# Altium PCB VR Interface.PcbDoc
Units mm, origin at the board's own origin, x right, y up, seen from the top; angles counter-clockwise.
Board outline 130 x 130 mm, 2 copper layers (Top Layer, Bottom Layer), stack 1.271 mm thick; 18 components, 9 nets, 58 pads, 0 vias.
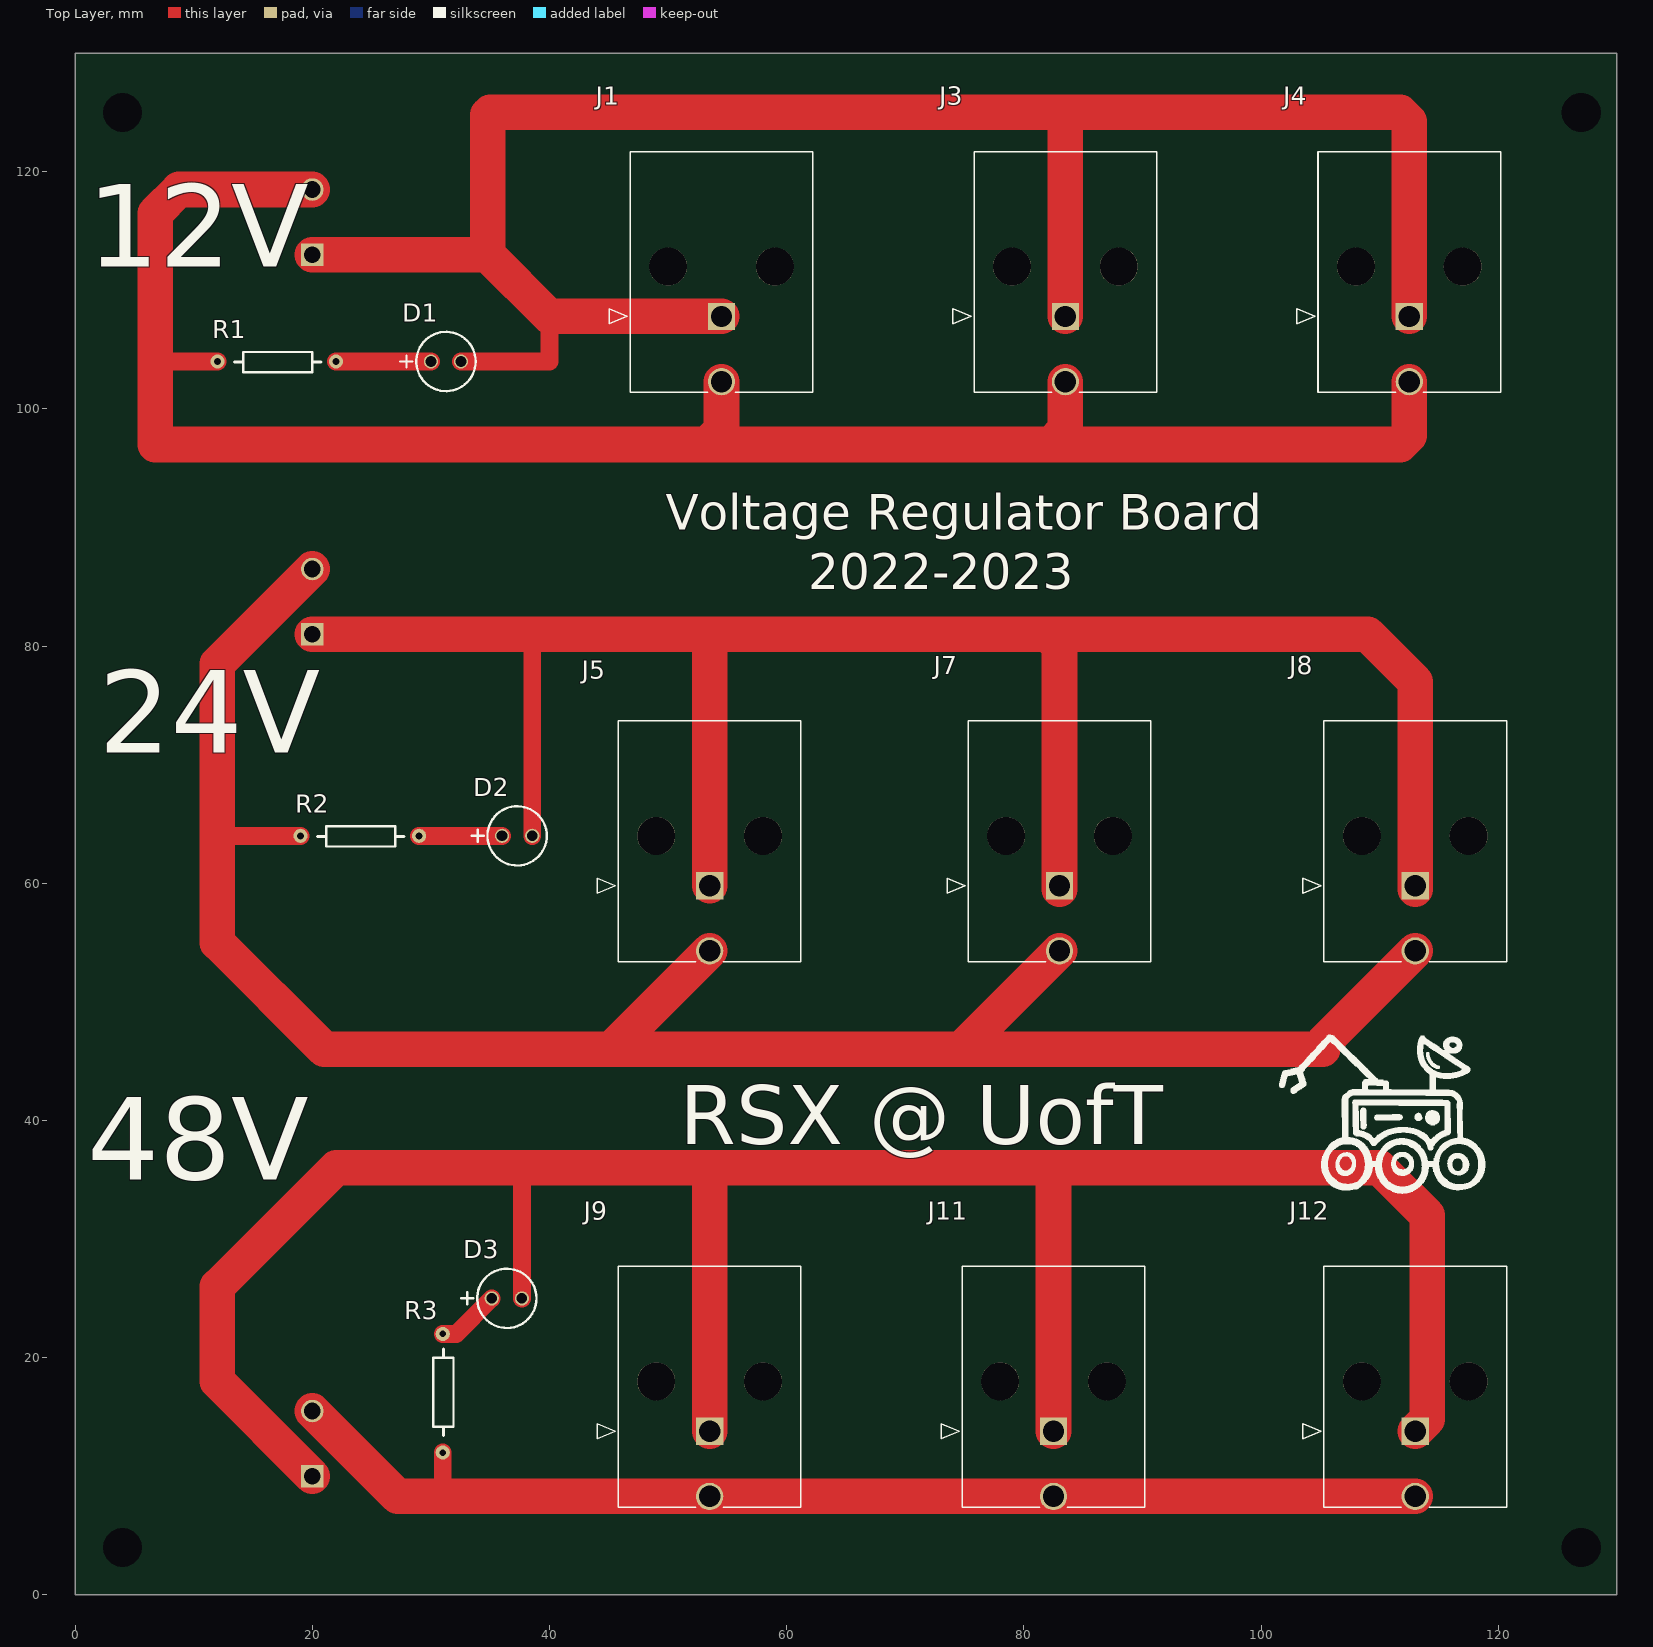
[diagram p0: Top Layer view]
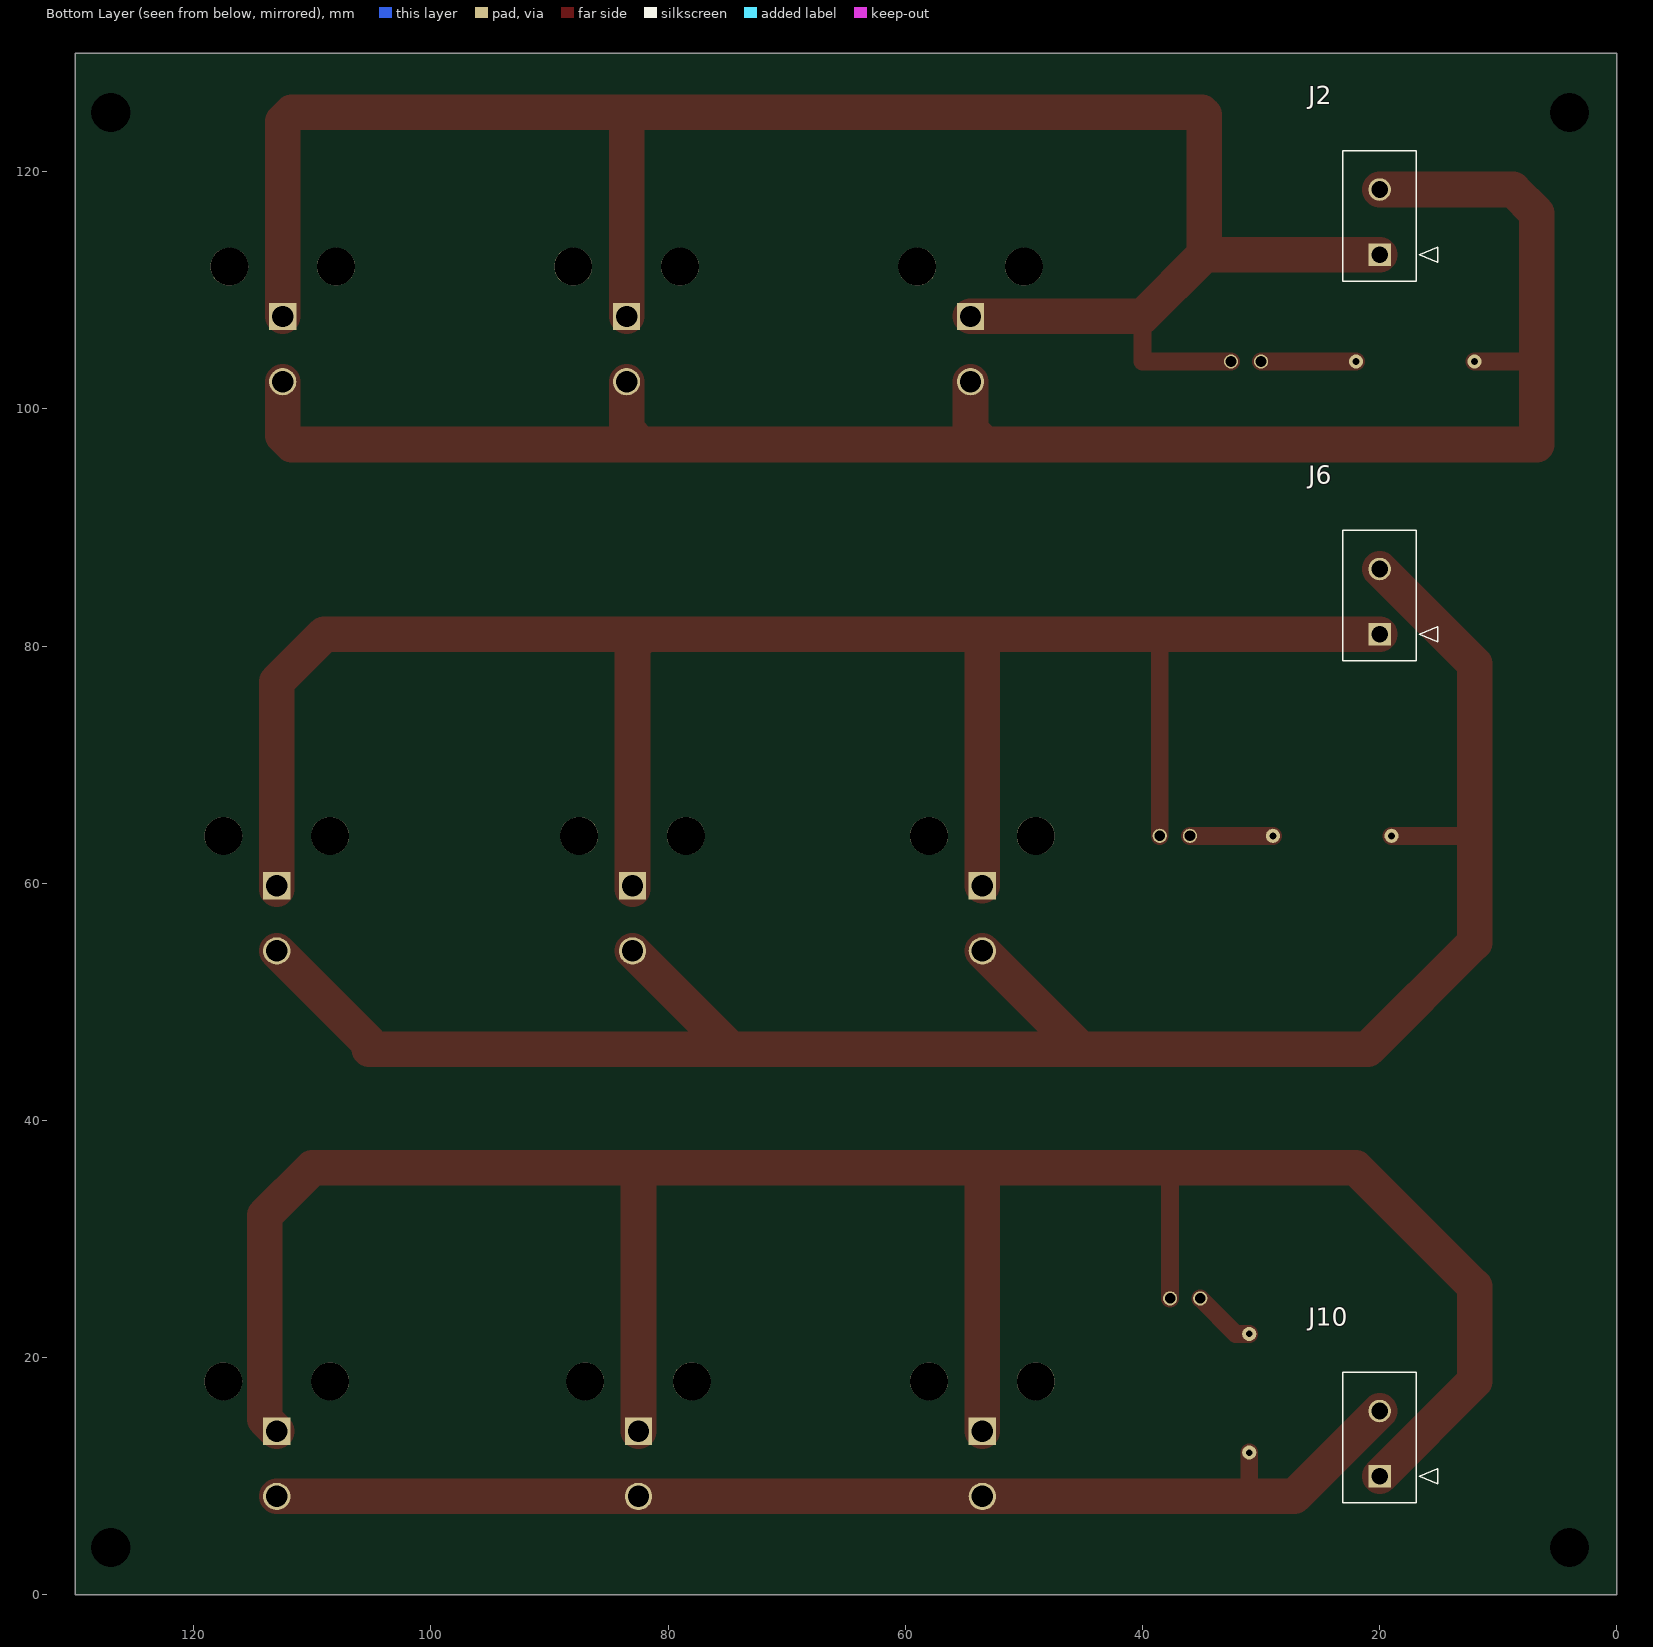
[diagram p1: Bottom Layer view, seen from below]
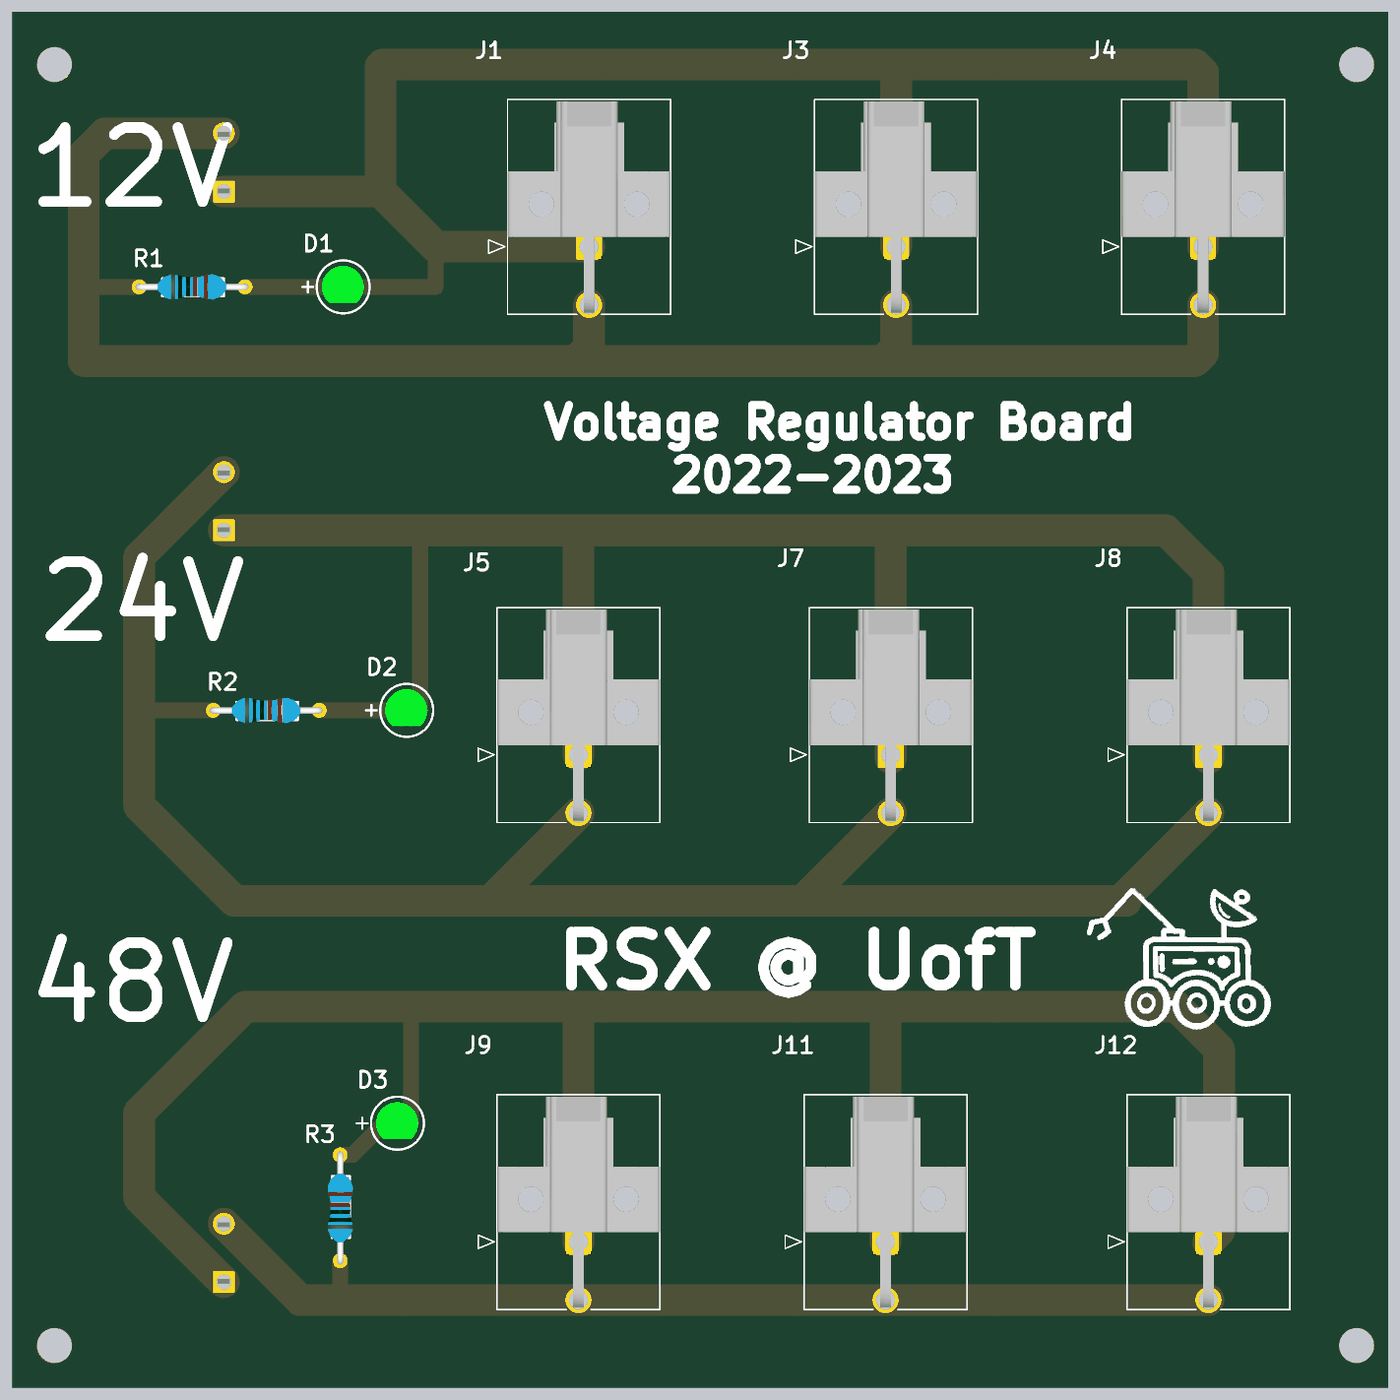
[diagram p2: 3D render of the assembled board from above, using the file's embedded part models]
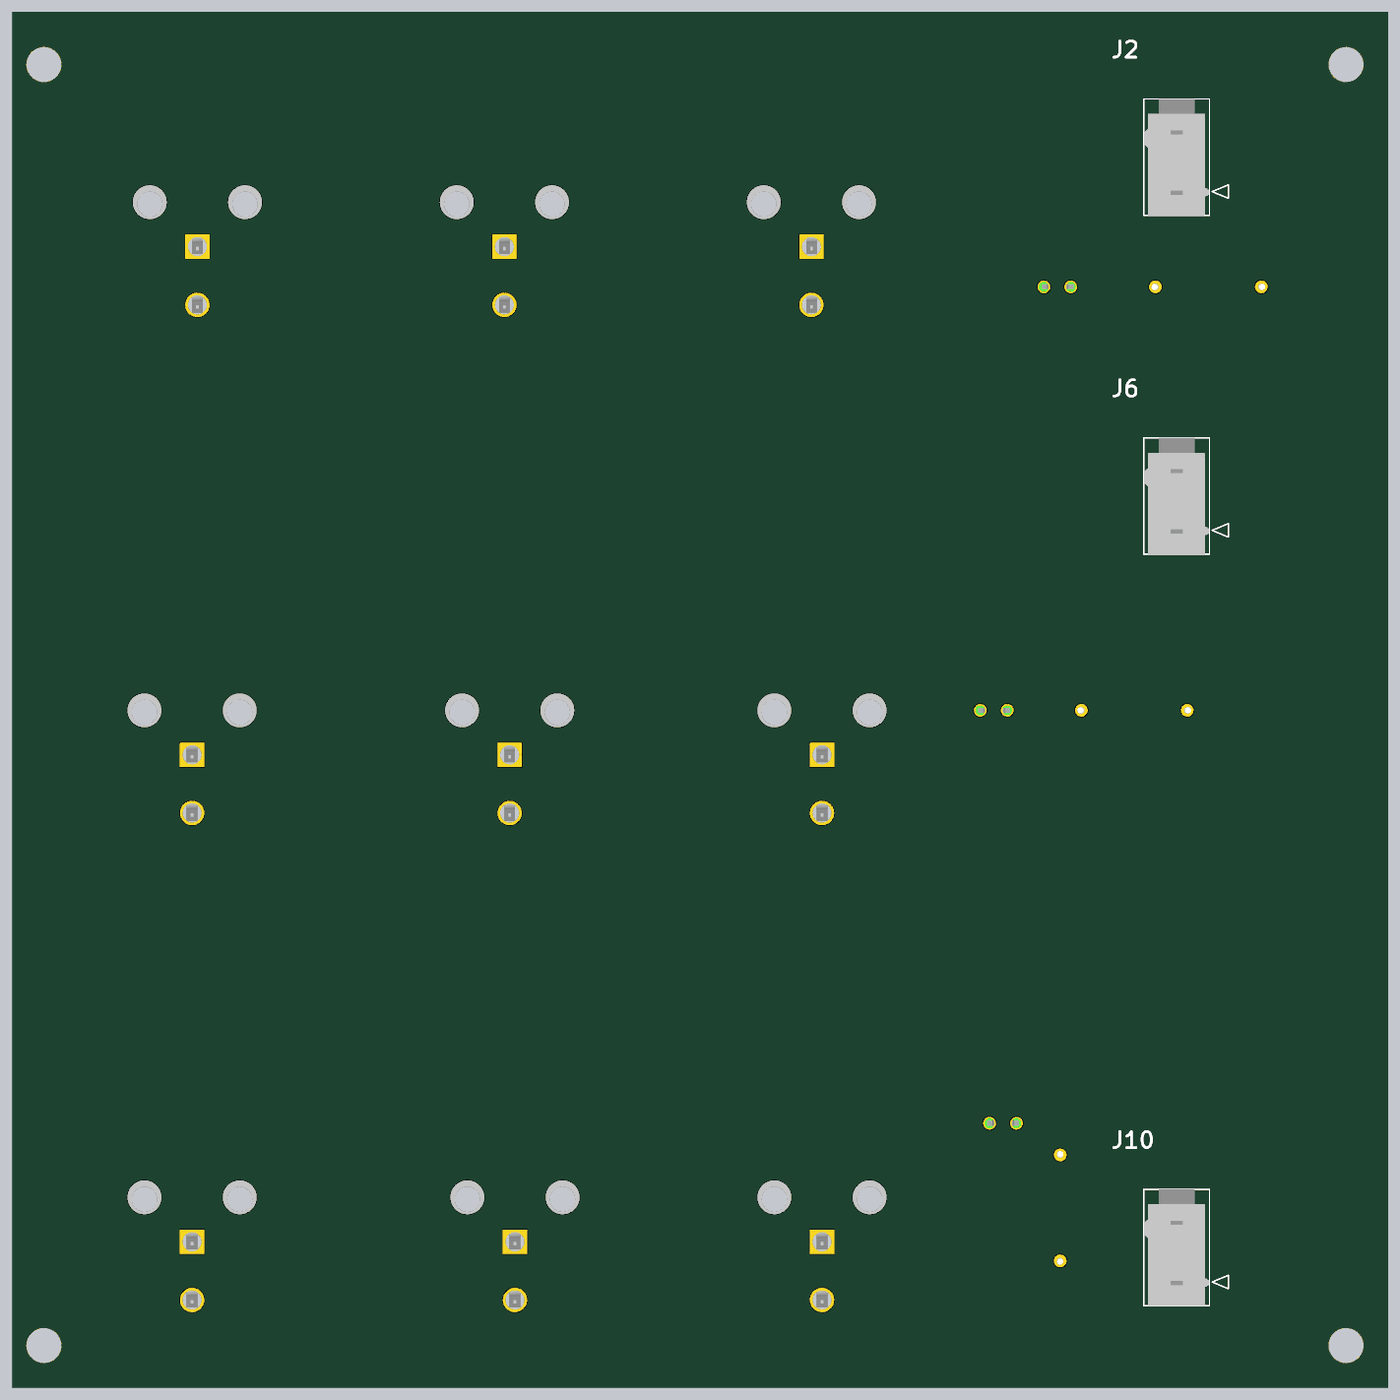
[diagram p3: 3D render of the assembled board from below, using the file's embedded part models]

## Layer stack, top to bottom
Top Solder: solder mask 0.0102, Solder Resist, Dk 3.5
Top Layer: signal copper 0.0356
Dielectric 1: dielectric 1.2, FR-4, Dk 4.8
Bottom Layer: signal copper 0.0356
Bottom Solder: solder mask 0.0102, Solder Resist, Dk 3.5

## Board outline
0,0 0,130 130,130 130,0

## Design rules (kind name [scope] priority, off if disabled: settings)
Clearance [All] p1: gap=0.254 ignorepadtopadclearanceinfootprint=FALSE
HoleSize [All] p1: absolutevalues=TRUE maxlimit=6.3 minlimit=0.2 maxpercent=80.000 minpercent=20.000
HoleToHoleClearance [All] p1: gap=0.5 allowstackedmicrovias=TRUE
PolygonConnect [All] p1: connectstyle=Relief reliefconductorwidth=0.254 reliefentries=4 polygonreliefangle="90 Angle" airgapwidth=0.254
RoutingVias [All] p1: holewidth=0.711 width=1.27 viastyle="Through Hole" minholewidth=0.711 minwidth=1.27 maxholewidth=0.711 maxwidth=1.27
SolderMaskExpansion [All] p1: expansion=0.102 istentingtop=FALSE
Width [All] p1: maxlimit=3.5 minlimit=1.5 preferedwidth=3
28 further rules are at their usual default settings.

## Components (designator, comment, footprint, x,y, rotation, side; value= is the part's Value field where it differs from the comment)
D1 "GREEN" LED 32.54,104 r180 top
D2 "GREEN" LED 38.54,64 r180 top
D3 "GREEN" LED 37.67,25 r180 top
J1 "1x2 Right Angle Header" "39291028 Molex Output" 54.5,107.8 r180 top
J2 "1x2 Staight Header" "39281023 Molex Input" 20,113 r0 bottom
J3 "1x2 Right Angle Header" "39291028 Molex Output" 83.5,107.8 r180 top
J4 "1x2 Right Angle Header" "39291028 Molex Output" 112.5,107.8 r180 top
J5 "1x2 Right Angle Header" "39291028 Molex Output" 53.5,59.8 r180 top
J6 "1x2 Staight Header" "39281023 Molex Input" 20,81 r0 bottom
J7 "1x2 Right Angle Header" "39291028 Molex Output" 83,59.8 r180 top
J8 "1x2 Right Angle Header" "39291028 Molex Output" 113,59.8 r180 top
J9 "1x2 Right Angle Header" "39291028 Molex Output" 53.5,13.8 r180 top
J10 "1x2 Staight Header" "39281023 Molex Input" 20,10 r0 bottom
J11 "1x2 Right Angle Header" "39291028 Molex Output" 82.5,13.8 r180 top
J12 "1x2 Right Angle Header" "39291028 Molex Output" 113,13.8 r180 top
R1 "600R" 600R 12,104 r0 top
R2 "1400R" 1400R 19,64 r0 top
R3 "3000R" 3000R 31,12 r90 top

## Footprints (in the part's own frame and the unit in brackets; to place one, negate y for a bottom-side part, rotate by r counter-clockwise, add the part's x,y. Pads: shape width x height; smd on the part's side, far side on the other; paste and mask are expansions set on the pad)
600R [mm]
  round 1.2 hole 0.6: 1(0,0) 2(10,0)
  silkscreen extent 1.45,-0.9 8.75,0.8, body extent -0.38,-1.21 10.38,1.2, height 3.2
1400R [mm]
  round 1.2 hole 0.58: 1(0,0) 2(10,0)
  silkscreen extent 1.45,-0.9 8.75,0.8, body extent -0.38,-1.21 10.38,1.2, height 3.2
3000R [mm]
  round 1.2 hole 0.55: 1(0,0) 2(10,0)
  silkscreen extent 1.45,-0.9 8.75,0.8, body extent -0.38,-1.2 10.38,1.21, height 3.2
"39281023 Molex Input" [mm]
  rect 1.9x1.9 hole 1.4 mask+0.076: 1(0,0)
  round 1.9 hole 1.4 mask+0.076: 2(0,-5.5)
  silkscreen extent -4.88,-8.75 3.1,2.25, body extent -3.1,-8.74 3.1,2.26, height 12.81
"39291028 Molex Output" [mm]
  rect 2.3x2.3 hole 1.8 mask+0.076: 1(0,0)
  round 2.3 hole 1.8 mask+0.076: 2(0,5.5)
  round 3.2 hole 3.2 unplated mask+0.076: M1(4.5,-4.2) M2(-4.5,-4.2)
  silkscreen extent -7.7,-13.9 9.48,6.4, body extent -7.7,-13.72 7.7,6.22, height 11.41
LED [mm]
  round 1.2 hole 0.9: 1(0,0) 2(2.54,0)
  silkscreen extent -1.23,-2.5 5.12,2.5, body extent -0.69,-1.99 3.29,1.5, height 5.02

## Part data
D1 D2 D3: library part WP7113GT, "Green T-1 3/4 5 mm 20° Tinted 80 mcd 2.2 V Solid State LED Lamp Through Hole", Case/Package=Radial, Color=Green, Forward Voltage=2.2V, Lens Color=Clear, Manufacturer=Kingbright, Package Quantity=1000, Supplier Part Number 1=754-1731-ND, Test Current=20mA, Category=LEDs, ComponentLink1Description=https://datasheet.ciiva.com/2120/wp7113gt-2120962.pdf?src-supplier=Digi-Key, ComponentLink1URL=https://datasheet.ciiva.com/2120/wp7113gt-2120962.pdf?src-supplier=Digi-Key, ComponentLink2Description=https://datasheet.ciiva.com/4692/wp7113gt-56132-4692472.pdf?src-supplier=Mouser, ComponentLink2URL=https://datasheet.ciiva.com/4692/wp7113gt-56132-4692472.pdf?src-supplier=Mouser, ComponentLink3Description=https://datasheet.ciiva.com/16510/wp7113gt-16510239.pdf?src-supplier=Future+Electronics, ComponentLink3URL=https://datasheet.ciiva.com/16510/wp7113gt-16510239.pdf?src-supplier=Future+Electronics, ComponentLink4Description=https://datasheet.ciiva.com/26292/wp7113gt-26292250.pdf?src-supplier=Digi-Key, ComponentLink4URL=https://datasheet.ciiva.com/26292/wp7113gt-26292250.pdf?src-supplier=Digi-Key, Dominant Wavelength=568nm, Height=8.6mm, Illumination Color=Green, Lead Free="Lead Free", Lens Style=Clear,Tinted,Dome, Luminous Intensity=80mcd, Manufacturer Part Number=WP7113GT, Mount="Through Hole", Packaging=Bulk, Pricing 1="1=0.38000, 10=0.25200, 100=0.16800, 500=0.11618, 1000=0.09682, 2000=0.08714, 5000=0.08230, 10000=0.07504, 25000=0.07019 (USD)", RoHS=Yes, RoHS Compliant=Yes, Stock 1=30029, Supplier 1=Digi-Key, Viewing Angle=20°, Wavelength=568nm
J1 J3 J4 J5 J7 J8 J9 J11 J12: library part 39-29-1028, "Connector Wire to Board Header 2 Position 4.2mm Solder Right Angle Thru-Hole Tray", Color=Natural, Contact Resistance=10mR, Current Rating=13A, Flammability Rating="UL94 V-2", Insulation Resistance=1GR, Manufacturer=Molex, Max Current Rating=5A, Max Operating Temperature=105°C, Max Voltage Rating (DC)=250V, Min Operating Temperature=-40°C, Package Quantity=600, Supplier Part Number 1=79AH9848, Voltage Rating=600V, Approvals=UL,CSA,TUV, Category="Headers and Wire Housings", ComponentLink1Description=https://datasheet.ciiva.com/5159/0039291028-pcb-headers-140068-5159558.pdf?src-supplier=Mouser, ComponentLink1URL=https://datasheet.ciiva.com/5159/0039291028-pcb-headers-140068-5159558.pdf?src-supplier=Mouser, ComponentLink2Description=https://datasheet.ciiva.com/34303/1968937-34303478.pdf?src-supplier=Jameco, ComponentLink2URL=https://datasheet.ciiva.com/34303/1968937-34303478.pdf?src-supplier=Jameco, ComponentLink3Description=https://datasheet.ciiva.com/11746/0900766b8059542f-11746930.pdf?src-supplier=RSComponents, ComponentLink3URL=https://datasheet.ciiva.com/11746/0900766b8059542f-11746930.pdf?src-supplier=RSComponents, ComponentLink4Description=https://datasheet.ciiva.com/9468/0039291028-pcb-headers-9468469.pdf?src-supplier=Avnet, ComponentLink4URL=https://datasheet.ciiva.com/9468/0039291028-pcb-headers-9468469.pdf?src-supplier=Avnet, ComponentLink5Description=https://datasheet.ciiva.com/1442/1859947-1442805.pdf?src-supplier=Element14, ComponentLink5URL=https://datasheet.ciiva.com/1442/1859947-1442805.pdf?src-supplier=Element14, Connector Type=Header, Contact Finish - Mating=TIN, Contact Gender=Male, Contact Material=Brass, Contact Plating=Tin,Copper, Contact Shape=Square, Contact Type="Male Pin", Depth=19.4mm, ELV=Compliant, Fastening Type=Ramp, Gender=Male, Glow Wire Compliant=Non-compliant, Halogen Free="Low Halogen", Height=9.91mm, Housing Color=Natural, Housing Material=Nylon, Insulation Color=Natural, Insulation Material=Nylon, Lead Free="Lead Free", Length=15.4mm, Manufacturer Part Number=39-29-1028, Material=Brass, Mount="Through Hole,Surface Mount", Number of Circuits=2, Number of Contacts=2, Number of Positions=2, Number of Rows=2, Orientation="Right Angle", Packaging=Bulk, Pitch=4.2mm, Pricing 1="1=1.17000, 10=0.95900, 25=0.90600, 50=0.85300, 100=0.80000, 250=0.77300 (CAD)", Radiation Hardening=No, RoHS=Yes, RoHS Compliant=Yes, Row Spacing=5.5mm, Series="Mini-Fit Jr 5569", Stock 1=1062, Supplier 1=Newark, Termination=Solder, Voltage Rating (DC)=600V
J2 J6 J10: library part 39-28-1023, "Connector Wire to Board Header 2 Position 4.2mm Solder Straight Thru-Hole Tray", Color=Natural,Clear, Contact Resistance=10mR, Current Rating=9A, Flammability Rating="UL94 V-2", Housing Color=Natural, Insulation Resistance=1GR, Manufacturer=Molex, Max Current Rating=15A, Max Operating Temperature=105°C, Max Voltage Rating (AC)=600V, Min Operating Temperature=-40°C, Package Quantity=1200, Supplier Part Number 1=38C9737, Working Voltage=250V, Approvals=UL,CSA,TUV, Category="Headers and Wire Housings", ComponentLink1Description=https://datasheet.ciiva.com/5157/0039281023-pcb-headers-228438-5157638.pdf?src-supplier=Mouser, ComponentLink1URL=https://datasheet.ciiva.com/5157/0039281023-pcb-headers-228438-5157638.pdf?src-supplier=Mouser, ComponentLink2Description=https://datasheet.ciiva.com/30094/32110039281023-pcb-headers-30094576.pdf?src-supplier=Onlinecomponents.com, ComponentLink2URL=https://datasheet.ciiva.com/30094/32110039281023-pcb-headers-30094576.pdf?src-supplier=Onlinecomponents.com, ComponentLink3Description=https://datasheet.ciiva.com/26921/getdatasheetpartid-293336-26921902.pdf?src-supplier=Verical, ComponentLink3URL=https://datasheet.ciiva.com/26921/getdatasheetpartid-293336-26921902.pdf?src-supplier=Verical, ComponentLink4Description=https://datasheet.ciiva.com/19462/1968742-19462127.pdf?src-supplier=Jameco, ComponentLink4URL=https://datasheet.ciiva.com/19462/1968742-19462127.pdf?src-supplier=Jameco, ComponentLink5Description=https://datasheet.ciiva.com/11746/0900766b80460d9e-11746456.pdf?src-supplier=RSComponents, ComponentLink5URL=https://datasheet.ciiva.com/11746/0900766b80460d9e-11746456.pdf?src-supplier=RSComponents, ComponentLink6Description=https://datasheet.ciiva.com/1442/1859939-1442781.pdf?src-supplier=Element14, ComponentLink6URL=https://datasheet.ciiva.com/1442/1859939-1442781.pdf?src-supplier=Element14, Connector Type=Power,Rectangular, Contact Gender=Male, Contact Material=Brass, Contact Plating=Tin,Copper, Contact Type="Male Pin", Depth=11mm, Fastening Type=Ramp, Gender=Male, Glow Wire Compliant=Non-compliant, Halogen Free="Low Halogen", Height=12mm, Housing Material=Nylon, Lead Free="Lead Free", Lead Pitch=4.2mm, Length=6.2mm, Manufacturer Part Number=39-28-1023, Max Voltage Rating (DC)=600V, Mount="Through Hole,Board", Number of Circuits=2, Number of Contacts=2, Number of Poles=2, Number of Ports=1, Number of Positions=2, Number of Rows=2, Orientation=Straight, Packaging=Tray, Pitch=4.2mm, Pricing 1="1=0.66300, 10=0.56200, 25=0.52000, 50=0.47800, 100=0.43700, 250=0.42600 (USD)", Radiation Hardening=No, RoHS=Yes, RoHS Compliant=Yes, Row Spacing=0.165inch, Series="Mini-Fit® Jr™ 5566", Stock 1=7932, Supplier 1=Newark, Termination=Solder, Voltage Rating=600V, Voltage Rating (AC)=600V, Voltage Rating (DC)=600V
R1: library part MRS25000C6000FCT00, "MRS25 Series Axial Thin Film Resistor 600Ohms +/-1% 0.6W +/-50ppm/degC", Case/Package=Axial, Manufacturer=Vishay, Max Operating Temperature=155°C, Max Power Dissipation=600mW, Min Operating Temperature=-55°C, Resistance Tolerance=1%, Resistor Type="Metal Film", Supplier Part Number 1=97K5918, Temperature Coefficient=50ppm/°C, Voltage Rating=350V, Category="Through-Hole Resistors", ComponentLink1Description=https://datasheet.ciiva.com/11825/0900766b80d9a016-11825068.pdf?src-supplier=RSComponents, ComponentLink1URL=https://datasheet.ciiva.com/11825/0900766b80d9a016-11825068.pdf?src-supplier=RSComponents, ComponentLink2Description=https://datasheet.ciiva.com/46445/483924-46445563.pdf?src-supplier=Element14, ComponentLink2URL=https://datasheet.ciiva.com/46445/483924-46445563.pdf?src-supplier=Element14, Construction=Cylindrical, Contact Plating=Tin, Diameter=2.5mm, Lead Free="Lead Free", Lead Length=26mm, Length=6.5mm, Manufacturer Part Number=MRS25000C6000FCT00, Military Standard=Not, Number of Pins=2, Number of Terminations=2, Packaging="Tape and Reel", Power Rating=600mW, Pricing 1="10=0.29800, 25=0.24900, 50=0.19900, 100=0.15100, 500=0.11200 (CAD)", Radiation Hardening=No, Reach SVHC Compliant=Yes, Resistance=600R, RoHS=Yes, RoHS Compliant=Yes, Series=MRS25, Stock 1=3212, Supplier 1=Newark, Technology="THIN FILM", Termination=Axial, Tolerance=1%, Voltage Rating (DC)=350V, Width=2.5mm
R2: library part SFR2500001401FR500, "Res Metal Film 1.4K Ohm 1% 2/5W ±100ppm/°C Conformal AXL Thru-Hole T/R", Case/Package=Axial, Manufacturer="Vishay BCcomponents", Max Operating Temperature=155°C, Max Power Dissipation=400mW, Min Operating Temperature=-55°C, Package Quantity=1, Resistance=1.4kR, Resistance Tolerance=1%, Resistor Type="Metal Film", Supplier Part Number 1=PPC1.40KYCT-ND, Temperature Coefficient=100ppm/°C, Voltage Rating=250V, Category="Through-Hole Resistors", ComponentLink1Description=https://datasheet.ciiva.com/8401/sfr16s25-8401039.pdf?src-supplier=Avnet, ComponentLink1URL=https://datasheet.ciiva.com/8401/sfr16s25-8401039.pdf?src-supplier=Avnet, ComponentLink2Description=https://datasheet.ciiva.com/2721/sfr16s25-2721545.pdf?src-supplier=Digi-Key, ComponentLink2URL=https://datasheet.ciiva.com/2721/sfr16s25-2721545.pdf?src-supplier=Digi-Key, ComponentLink3Description=https://datasheet.ciiva.com/2721/sfr16s25-2721546.pdf?src-supplier=Digi-Key, ComponentLink3URL=https://datasheet.ciiva.com/2721/sfr16s25-2721546.pdf?src-supplier=Digi-Key, ComponentLink4Description=https://datasheet.ciiva.com/7851/158075-7851882.pdf?src-supplier=Element14, ComponentLink4URL=https://datasheet.ciiva.com/7851/158075-7851882.pdf?src-supplier=Element14, Contact Plating=Tin, Diameter=2.5mm, Lead Diameter=0.58mm, Length=0.256inch, Manufacturer Part Number=SFR2500001401FR500, Number of Pins=2, Number of Terminations=2, Packaging="Tape and Reel", Power Rating=400mW, Pricing 1="1=0.21000, 10=0.17400, 25=0.12680, 50=0.09200, 100=0.06820, 250=0.05232, 500=0.04122, 1000=0.02854 (USD)", RoHS=Yes, RoHS Compliant=Yes, Series=SFR25, Stock 1=4844, Supplier 1=Digi-Key, Termination=Axial, Tolerance=1%, Voltage Rating (DC)=250V
R3: library part CFR-25JB-52-3K, "General Type Carbon Film Resistor 3kOhm 1/4W 5% Axial Bulk", Case/Package=Axial, Manufacturer=Yageo, Max Operating Temperature=155°C, Max Power Dissipation=250mW, Min Operating Temperature=-55°C, Package Quantity=200, Resistance=3kR, Resistor Type="Carbon Film", Supplier Part Number 1=3.0KQBK-ND, Temperature Coefficient=500ppm/°C, Tolerance=5%, Category="Through-Hole Resistors", ComponentLink1Description=http://www.yageo.com/NewPortal/yageodocoutput?fileName=/pdf/throughhole/Yageo_LR_CFR_2013.pdf&src-supplier=Digi-Key, ComponentLink1URL=http://www.yageo.com/NewPortal/yageodocoutput?fileName=/pdf/throughhole/Yageo_LR_CFR_2013.pdf&src-supplier=Digi-Key, ComponentLink2Description=http://www.yageo.com/documents/recent/General%20Type_CFR.pdf?src-supplier=Future+Electronics, ComponentLink2URL=http://www.yageo.com/documents/recent/General%20Type_CFR.pdf?src-supplier=Future+Electronics, Lead Free="Lead Free", Length=0.248inch, Manufacturer Part Number=CFR-25JB-52-3K, Number of Terminations=2, Packaging=Bulk, Power Rating=250mW, Pricing 1="1=0.10000, 10=0.06800, 25=0.04680, 50=0.03640, 100=0.02600, 250=0.02028, 500=0.01612, 1000=0.01144, 5000=0.00884 (USD)", RoHS=Yes, RoHS Compliant=Yes, Series="Carbon Film", Stock 1=879, Supplier 1=Digi-Key

## Free pads (board coordinates)
  round 1.524 hole 3.3: 2(4,4) 2(4,125) 2(127,4) 4(127,125)

## Nets (pads, with @x,y where several pads share a name; then routed paths per layer and width w, separated by ;. In a path a pad name is that pad's centre, name@x,y a point inside that pad or via, vN(x,y) a via of type N, cw(c..) or ccw(c..) an arc to the next point about the centre after c; other vN are vias at no path point)
NetD1_1: D1.1 J1.1 J2.1 J3.1 J4.1 | length 171.8
  Top Layer w1.5: D1.1 40,104 40,107.8
  Top Layer w3: J2.1 34.8,113 ; J1.1 40,107.8 34.8,113 ; J3.1 83.5,124.238 82.738,125 ; J4.1 112.5,124.238 111.738,125 82.738,125 ; 34.8,113 34.8,124.8 35,125 82.738,125
NetD1_2: D1.2 R1.2 | length 8
  Top Layer w1.5: R1.2 D1.2
NetD2_1: D2.1 J5.1 J6.1 J7.1 J8.1 | length 172.7
  Top Layer w1.5: 38,81 38.54,80.46 D2.1
  Top Layer w3: J6.1 38,81 53,81 ; J5.1 53.5,80.5 53,81 ; J7.1@83,59.5 83,80 82,81 ; J8.1@113,59.5 113,77 109,81 82,81 ; 53,81 82,81
NetD2_2: D2.2 R2.2 | length 7
  Top Layer w1.5: R2.2 D2.2
NetD3_1: D3.1 J9.1 J10.1 J11.1 J12.1 | length 201.7
  Top Layer w1.5: D3.1 37.67,35.67 38,36
  Top Layer w3: J10.1 12,18 12,26 22,36 38,36 53,36 ; J9.1 53.5,35.5 53,36 ; J11.1 82.5,35.5 83,36 ; J12.1 114,14.8 114,32 110,36 83,36 ; 53,36 83,36
NetD3_2: D3.2 R3.2 | length 5.4
  Top Layer w1.5: R3.2 32.13,22 D3.2
NetJ1_2: J1.2 J2.2 J3.2 J4.2 R1.1 | length 161
  Top Layer w1.5: 6.762,104 R1.1
  Top Layer w3: J2.2 8.757,118.5 6.762,116.504 6.762,104 6.762,97 53.238,97 ; J1.2 54.5,98.262 53.238,97 ; J3.2 83.5,98.262 82.238,97 ; J4.2 112.5,97.762 111.738,97 82.238,97 ; 53.238,97 82.238,97
NetJ5_2: J5.2 J6.2 J7.2 J8.2 R2.1 | length 173.7
  Top Layer w1.5: 12,64 R2.1
  Top Layer w3: J6.2 12,78.5 12,64 12,55 21,46 45.2,46 ; J5.2 45.2,46 ; J7.2 74.7,46 ; J8.2 105.2,46.5 105.2,46 74.7,46 ; 45.2,46 74.7,46
NetJ9_2: J9.2 J10.2 J11.2 J12.2 R3.1 | length 99.7
  Top Layer w1.5: 31,8.3 R3.1
  Top Layer w3: J10.2 27.2,8.3 31,8.3 J9.2 J11.2 J12.2
pads on no net: J1.M1 J1.M2 J3.M1 J3.M2 J4.M1 J4.M2 J5.M1 J5.M2 J7.M1 J7.M2 J8.M1 J8.M2 J9.M1 J9.M2 J11.M1 J11.M2 J12.M1 J12.M2

## Silkscreen, mask and mechanical layers (free items; w line width, h text height)
Top Overlay:
  drawing of 10 lines, arcs and shapes, not listed
  text "12V" at 1,112 h7
  text "Voltage Regulator Board" at 49.8,89.8 h3
  text "2022-2023" at 61.8,84.8 h3
  text "24V" at 2,71 h7
  text "RSX @ UofT" at 51,38 h5
  text "48V" at 1,35 h7